# EAGLE board Adafruit-NeoPixel-JST-SH-Breakout (EAGLE 9.6.2)
REV: B
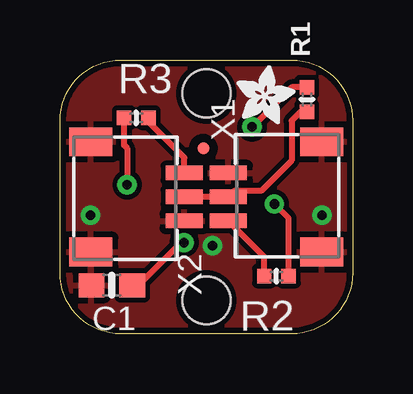
[diagram p0: board, top side]
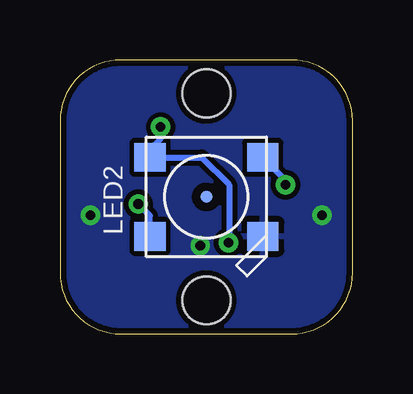
[diagram p1: board, bottom side, seen from below]

Size 12.19 x 11.43 mm. Coordinates in mm from the lower left corner, seen from the top.
Outline: 2.54,11.43 9.65,11.43 arc-90 12.19,8.89 12.19,2.54 arc-90 9.65,0 2.54,0 arc-90 0,2.54 0,8.89 arc-90 2.54,11.43
Copper layers (1*16): Top 0.035mm / dielectric 1.5mm / Bottom 0.035mm
Design rules "adafruit 7-7": minimum track width 7mil, minimum drill 15.5mil, track to track 8mil, track to pad 7mil, pad to pad 7mil, via to via 7mil, smd to smd 7mil, copper to edge 10mil, drill to drill 8mil, minimum pad ring 10mil, minimum via ring 8mil, stop-mask expansion 2mil, vias tented up to drill 20mil, thermal gap 10mil
Holes 2 mm at 6.1,10.03 6.1,1.4

## Footprints (pad centres in the part's own frame; a part is rotated, then mirrored left to right if it is on the bottom)
0603-NO = smd 1.075 x 1: 1 -0.85,0; 2 0.85,0
FIDUCIAL_0.5MM = smd 0.5 x 0.5: 1 0,0
WS2812B-NARROW = smd 1.3 x 1.2: 1-VDD 2.35,-1.65; 2-DOUT 2.35,1.65; 3-GND -2.35,1.65; 4-DIN -2.35,-1.65
_0402NO = smd 0.6 x 0.6: 1 -0.508,0; 2 0.508,0
JST_SH3 = smd 0.6 x 1.55: 1 -1,2.006; 2 0,2.006; 3 1,2.006 | smd 1.2 x 1.8: MT1 -2.3,-1.894; MT2 2.3,-1.894

## Placement (x,y rotation side)
C1  1uF  [0603-NO]  2.16,2.03 180 top
FID1  FIDUCIAL_0.5MM  [FIDUCIAL_0.5MM]  5.97,7.75 0 top
FID2  FIDUCIAL_0.5MM  [FIDUCIAL_0.5MM]  6.1,5.71 0 bottom
LED2  WS2812B_5050N  [WS2812B-NARROW]  6.1,5.71 180 bottom
PLABEL0  [PLABEL0]  3.43,0.38 0 top
PLABEL1  [PLABEL1]  7.24,0.38 0 top
PLABEL2  [PLABEL2]  0.76,9.53 0 top
R1  47  [_0402NO]  10.29,9.78 90 top
R2  22  [_0402NO]  9.02,2.41 180 top
R3  22  [_0402NO]  3.18,9.02 0 top
U$1  [ADAFRUIT_2.5MM]  7.37,8.76 0 top
X1  JST SH 3P  [JST_SH3]  3.18,5.71 270 top
X2  JST SH 3P  [JST_SH3]  9.02,5.71 90 top

## Library data of the parts
C1 FID1 FID2 LED2 R1-R3 U$1 = microbuilder
PLABEL0 PLABEL1 PLABEL2 = pinguin
X1 X2 = adafruit_electromech

## Nets
GND: C1.2 LED2.3-GND X1.3 X1.MT1 X1.MT2 X2.3 X2.MT1 X2.MT2
IN: R3.2 X1.1
N$1: LED2.2-DOUT R2.1
N$2: LED2.4-DIN R3.1
N$3: C1.1 LED2.1-VDD R1.2
OUT: R2.2 X2.1
VDD: R1.1 X1.2 X2.2

## Tracks (layer width: path | path; a pad name or v marks a point on that pad's centre or on a via)
GND  (via drill 0.4)
  other vias: 1.27,4.95 10.92,4.95 6.35,3.68
  pour Top: 0,11.43 12.19,11.43 12.19,0 0,0
  pour Bottom: 0,11.43 12.19,11.43 12.19,0 0,0
IN
  Top 0.254: X1.1 5.18,7.35 3.68,8.85 R3.2
N$1  (via drill 0.4)
  Top 0.254: R2.1 9.53,4.83 v8.93,5.42
  Bottom 0.254: v8.93,5.42 8.45,4.94 LED2.2-DOUT
N$2  (via drill 0.4)
  Top 0.254: v2.79,6.22 2.79,7.75 2.67,7.87 R3.1
  Bottom 0.254: LED2.4-DIN 2.8,6.42 v2.79,6.22
N$3  (via drill 0.4)
  Top 0.254: R1.2 9.65,10.29 v8,8.64 | v5.17,3.81 5.04,3.81 3.27,2.03 C1.1
  Bottom 0.254: v8,8.64 8,8.13 8.45,7.68 LED2.1-VDD 6.29,7.37 5.14,6.22 5.14,3.84 v5.17,3.81
OUT
  Top 0.254: R2.2 8.51,3.22 X2.1
VDD
  Top 0.254: R1.1 10.03,9.27 9.65,8.89 9.65,7.24 8.38,5.97 7.27,5.97 X2.2 X1.2

## Text on the board
Pinguin_tBackup: NeoPix | + | + | G | G | In | O | In | Out
Pinguin_bBackup: 5050 RGB / NeoPixel | V+ 3.5~5V